# EAGLE board SparkFun_u-blox_SAM-M10Q-Panel (EAGLE 9.6.2), part 1 of 3
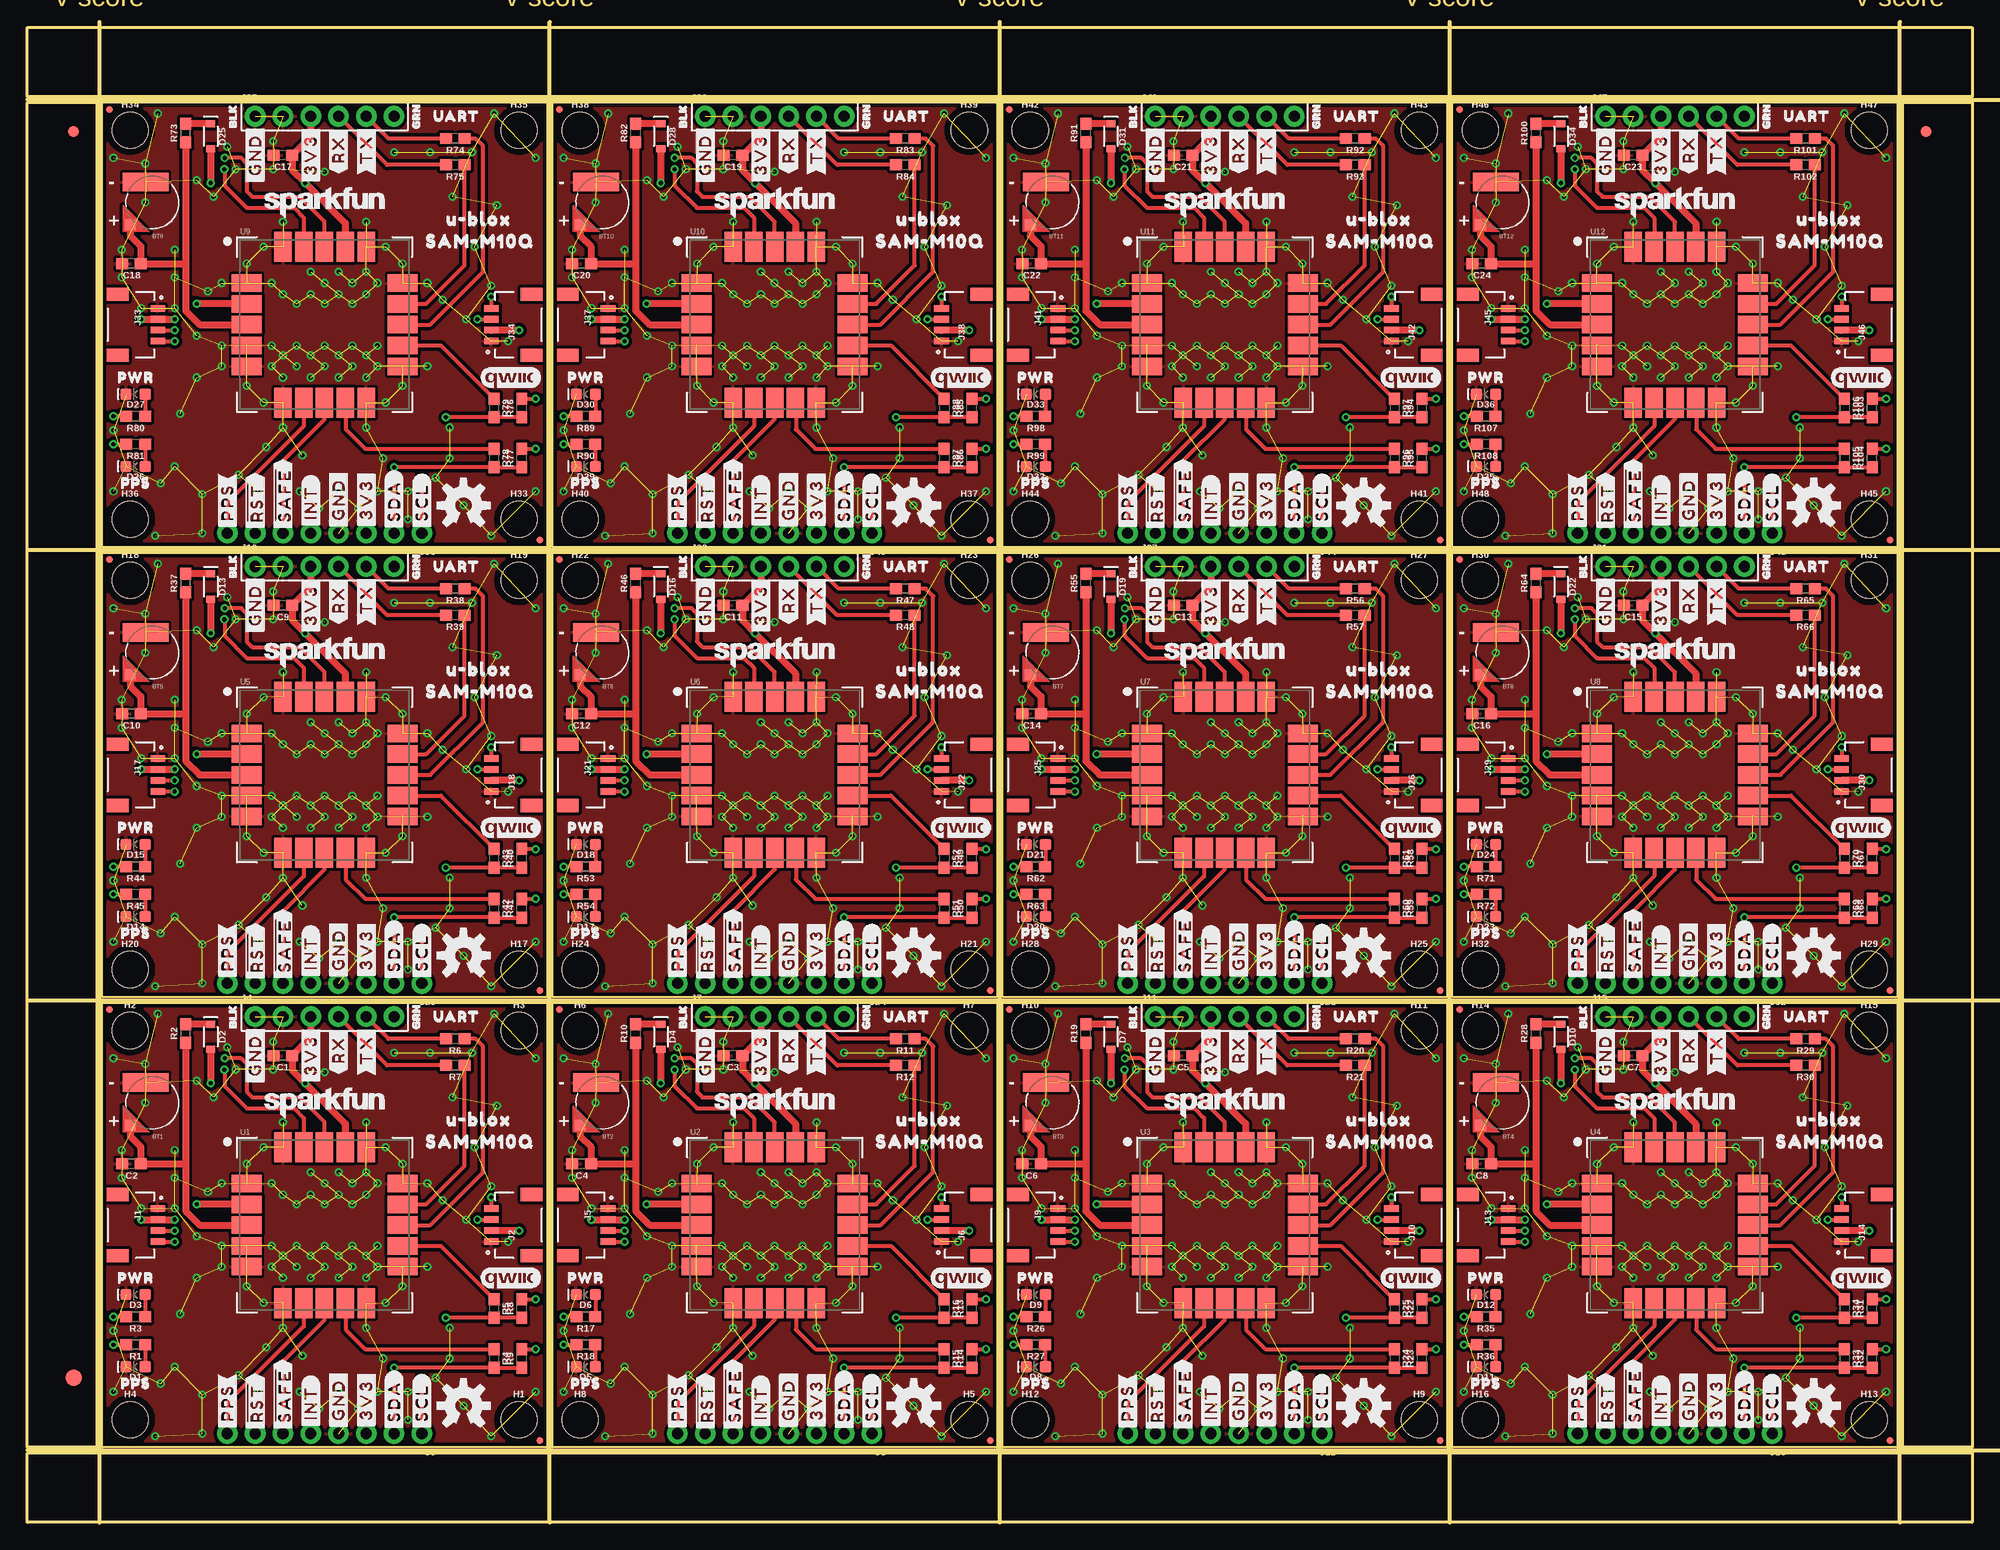
[diagram p0: board, top side]
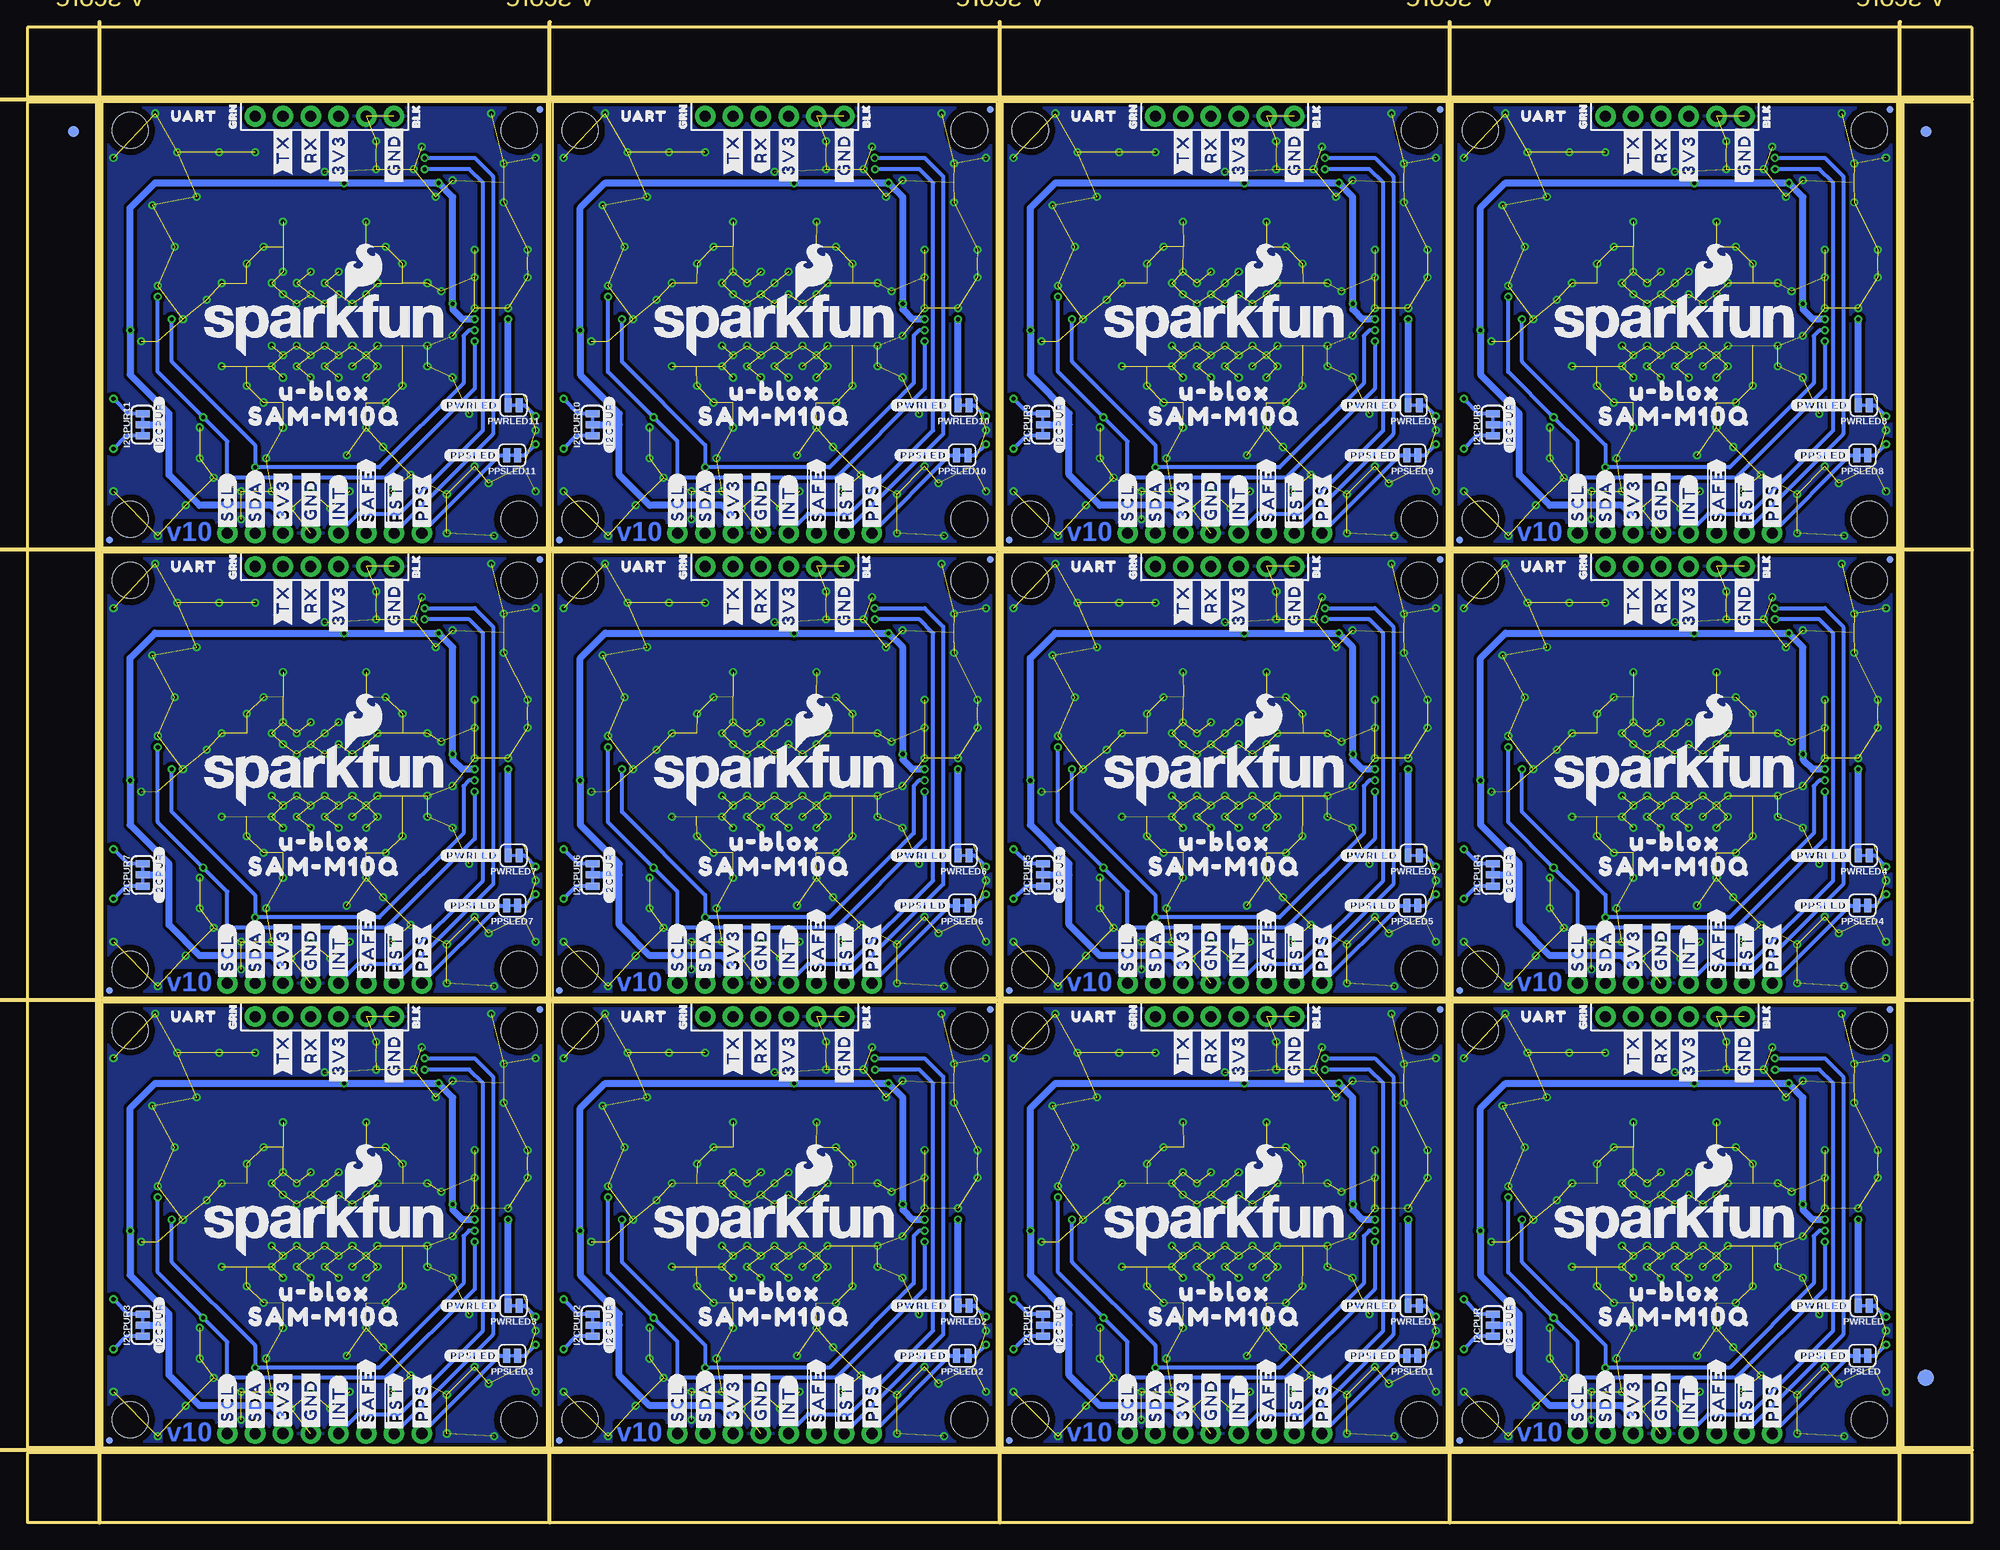
[diagram p1: board, bottom side, seen from below]

Size 177.8 x 136.65 mm. Coordinates in mm from the lower left corner, seen from the top.
Outline: 6.86,6.86 6.86,47.5 47.5,47.5 47.5,6.86 6.86,6.86
Outline: 48.01,6.86 48.01,47.5 88.65,47.5 88.65,6.86 48.01,6.86
Outline: 89.15,6.86 89.15,47.5 129.79,47.5 129.79,6.86 89.15,6.86
Outline: 130.3,6.86 130.3,47.5 170.94,47.5 170.94,6.86 130.3,6.86
Outline: 6.86,48.01 6.86,88.65 47.5,88.65 47.5,48.01 6.86,48.01
Outline: 48.01,48.01 48.01,88.65 88.65,88.65 88.65,48.01 48.01,48.01
Outline: 89.15,48.01 89.15,88.65 129.79,88.65 129.79,48.01 89.15,48.01
Outline: 130.3,48.01 130.3,88.65 170.94,88.65 170.94,48.01 130.3,48.01
Outline: 6.86,89.15 6.86,129.79 47.5,129.79 47.5,89.15 6.86,89.15
Outline: 48.01,89.15 48.01,129.79 88.65,129.79 88.65,89.15 48.01,89.15
Outline: 89.15,89.15 89.15,129.79 129.79,129.79 129.79,89.15 89.15,89.15
Outline: 130.3,89.15 130.3,129.79 170.94,129.79 170.94,89.15 130.3,89.15
Outline: 0,6.35 177.8,6.35 177.8,0 0,0 0,6.35
Outline: 171.45,129.79 177.8,129.79 177.8,6.86 171.45,6.86 171.45,129.79
Outline: 0,136.65 177.8,136.65 177.8,130.3 0,130.3 0,136.65
Outline: 0,129.79 6.35,129.79 6.35,6.86 0,6.86 0,129.79
Copper layers (1*16): Top 0.035mm / dielectric 1.5mm / Bottom 0.035mm
Design rules "SparkFun_u-blox_SAM-M10Q": minimum track width 7mil, minimum drill 0.3mm, track to track 7mil, track to pad 7mil, pad to pad 7mil, via to via 7mil, smd to smd 7mil, copper to edge 7mil, drill to drill 7mil, minimum pad ring 7mil, minimum via ring 7mil, stop-mask expansion 3mil, vias tented up to drill 25mil, thermal gap 10mil
tRestrict: area 19.8,24.3 to 20.3,24.4; area 61,24.3 to 61.5,24.4; area 102.1,24.3 to 102.6,24.4; area 143.3,24.3 to 143.8,24.4; area 19.8,65.4 to 20.3,65.5; area 61,65.4 to 61.5,65.5; area 102.1,65.4 to 102.6,65.5; area 143.3,65.4 to 143.8,65.5; area 19.8,106.6 to 20.3,106.7; area 61,106.6 to 61.5,106.7; area 102.1,106.6 to 102.6,106.7; area 143.3,106.6 to 143.8,106.7
Milling: 9 lines

## Footprints (pad centres in the part's own frame; a part is rotated, then mirrored left to right if it is on the bottom)
MS421R_IV03E = smd 1 x 1: + 2.022,2.032 | smd 4.2 x 1.7: - 0.6,-1.85
0603 = smd 1.1 x 1: 1 -0.85,0; 2 0.85,0
LED-0603 = smd 1 x 1: A -0.877,0; C 0.877,0
SOD-323 = smd 0.63 x 0.83: A 1.15,0; C -1.15,0
FIDUCIAL-1X2 = smd 1 x 1: 1 0,0
FIDUCIAL-1.5X3 = smd 1.5 x 1.5: 1 0,0
FIDUCIAL-MICRO = smd 0.635 x 0.635: 1 0,0
STAND-OFF = hole 3.302: 0,0
SMT-JUMPER_3_2-NC_TRACE_SILK = smd 0.635 x 1.27: 1 -1.016,0; 2 0,0; 3 1.016,0
JST04_1MM_RA = smd 0.6 x 1.35: 1 -1.5,0; 2 -0.5,0; 3 0.5,0; 4 1.5,0 | smd 1.2 x 2: NC1 2.8,-3.675; NC2 -2.8,-3.675
1X08_NO_SILK = drill 1.016 pad 1.88: 1 0,0; 2 2.54,0; 3 5.08,0; 4 7.62,0; 5 10.16,0; 6 12.7,0; 7 15.24,0; 8 17.78,0
1X06_NO_SILK = drill 1.016 pad 1.88: 1 0,0; 2 2.54,0; 3 5.08,0; 4 7.62,0; 5 10.16,0; 6 12.7,0
SMT-JUMPER_2_NC_TRACE_SILK = smd 0.635 x 1.27: 1 -0.508,0; 2 0.508,0
SAM-M10Q_QUAD_PASTE = smd 2.75 x 1.6: 1 -7.125,3.8; 2 -7.125,1.9; 3 -7.125,0; 4 -7.125,-1.9; 5 -7.125,-3.8; 11 7.125,-3.8; 12 7.125,-1.9; 13 7.125,0; 14 7.125,1.9; 15 7.125,3.8 | smd 1.6 x 2.75: 6 -3.8,-7.125; 7 -1.9,-7.125; 8 0,-7.125; 9 1.9,-7.125; 10 3.8,-7.125; 16 3.8,7.125; 17 1.9,7.125; 18 0,7.125; 19 -1.9,7.125; 20 -3.8,7.125

## Placement (x,y rotation side)
BT1  6.8MM_COIN_CELL  [MS421R_IV03E]  11.43,38.35 180 top
BT2  6.8MM_COIN_CELL  [MS421R_IV03E]  52.58,38.35 180 top
BT3  6.8MM_COIN_CELL  [MS421R_IV03E]  93.73,38.35 180 top
BT4  6.8MM_COIN_CELL  [MS421R_IV03E]  134.87,38.35 180 top
BT5  6.8MM_COIN_CELL  [MS421R_IV03E]  11.43,79.5 180 top
BT6  6.8MM_COIN_CELL  [MS421R_IV03E]  52.58,79.5 180 top
BT7  6.8MM_COIN_CELL  [MS421R_IV03E]  93.73,79.5 180 top
BT8  6.8MM_COIN_CELL  [MS421R_IV03E]  134.87,79.5 180 top
BT9  6.8MM_COIN_CELL  [MS421R_IV03E]  11.43,120.65 180 top
BT10  6.8MM_COIN_CELL  [MS421R_IV03E]  52.58,120.65 180 top
BT11  6.8MM_COIN_CELL  [MS421R_IV03E]  93.73,120.65 180 top
BT12  6.8MM_COIN_CELL  [MS421R_IV03E]  134.87,120.65 180 top
C1  0.1uF  [0603]  23.37,42.67 180 top
C2  0.1uF  [0603]  9.52,32.77 180 top
C3  0.1uF  [0603]  64.52,42.67 180 top
C4  0.1uF  [0603]  50.67,32.77 180 top
C5  0.1uF  [0603]  105.66,42.67 180 top
C6  0.1uF  [0603]  91.82,32.77 180 top
C7  0.1uF  [0603]  146.81,42.67 180 top
C8  0.1uF  [0603]  132.97,32.77 180 top
C9  0.1uF  [0603]  23.37,83.82 180 top
C10  0.1uF  [0603]  9.52,73.91 180 top
C11  0.1uF  [0603]  64.52,83.82 180 top
C12  0.1uF  [0603]  50.67,73.91 180 top
C13  0.1uF  [0603]  105.66,83.82 180 top
C14  0.1uF  [0603]  91.82,73.91 180 top
C15  0.1uF  [0603]  146.81,83.82 180 top
C16  0.1uF  [0603]  132.97,73.91 180 top
C17  0.1uF  [0603]  23.37,124.97 180 top
C18  0.1uF  [0603]  9.52,115.06 180 top
C19  0.1uF  [0603]  64.52,124.97 180 top
C20  0.1uF  [0603]  50.67,115.06 180 top
C21  0.1uF  [0603]  105.66,124.97 180 top
C22  0.1uF  [0603]  91.82,115.06 180 top
C23  0.1uF  [0603]  146.81,124.97 180 top
C24  0.1uF  [0603]  132.97,115.06 180 top
D1  Yellow  [LED-0603]  9.91,14.22 180 top
D2  0.5A/40V/420mV  [SOD-323]  16.76,44.4 270 top
D3  RED  [LED-0603]  9.91,20.83 180 top
D4  0.5A/40V/420mV  [SOD-323]  57.91,44.4 270 top
D5  Yellow  [LED-0603]  51.05,14.22 180 top
D6  RED  [LED-0603]  51.05,20.83 180 top
D7  0.5A/40V/420mV  [SOD-323]  99.06,44.4 270 top
D8  Yellow  [LED-0603]  92.2,14.22 180 top
D9  RED  [LED-0603]  92.2,20.83 180 top
D10  0.5A/40V/420mV  [SOD-323]  140.21,44.4 270 top
D11  Yellow  [LED-0603]  133.35,14.22 180 top
D12  RED  [LED-0603]  133.35,20.83 180 top
D13  0.5A/40V/420mV  [SOD-323]  16.76,85.55 270 top
D14  Yellow  [LED-0603]  9.91,55.37 180 top
D15  RED  [LED-0603]  9.91,61.98 180 top
D16  0.5A/40V/420mV  [SOD-323]  57.91,85.55 270 top
D17  Yellow  [LED-0603]  51.05,55.37 180 top
D18  RED  [LED-0603]  51.05,61.98 180 top
D19  0.5A/40V/420mV  [SOD-323]  99.06,85.55 270 top
D20  Yellow  [LED-0603]  92.2,55.37 180 top
D21  RED  [LED-0603]  92.2,61.98 180 top
D22  0.5A/40V/420mV  [SOD-323]  140.21,85.55 270 top
D23  Yellow  [LED-0603]  133.35,55.37 180 top
D24  RED  [LED-0603]  133.35,61.98 180 top
D25  0.5A/40V/420mV  [SOD-323]  16.76,126.7 270 top
D26  Yellow  [LED-0603]  9.91,96.52 180 top
D27  RED  [LED-0603]  9.91,103.12 180 top
D28  0.5A/40V/420mV  [SOD-323]  57.91,126.7 270 top
D29  Yellow  [LED-0603]  51.05,96.52 180 top
D30  RED  [LED-0603]  51.05,103.12 180 top
D31  0.5A/40V/420mV  [SOD-323]  99.06,126.7 270 top
D32  Yellow  [LED-0603]  92.2,96.52 180 top
D33  RED  [LED-0603]  92.2,103.12 180 top
D34  0.5A/40V/420mV  [SOD-323]  140.21,126.7 270 top
D35  Yellow  [LED-0603]  133.35,96.52 180 top
D36  RED  [LED-0603]  133.35,103.12 180 top
E$1  [FIDUCIAL-1X2]  4.23,127.13 0 top
E$2  [FIDUCIAL-1X2]  4.23,127.13 0 bottom
E$3  [FIDUCIAL-1X2]  173.57,127.13 0 top
E$4  [FIDUCIAL-1X2]  173.57,127.13 0 bottom
E$5  [FIDUCIAL-1.5X3]  4.23,13.21 0 top
E$6  [FIDUCIAL-1.5X3]  4.23,13.21 0 bottom
FD1  FIDUCIALUFIDUCIAL  [FIDUCIAL-MICRO]  46.86,7.49 0 bottom
FD2  FIDUCIALUFIDUCIAL  [FIDUCIAL-MICRO]  7.49,46.86 0 top
FD3  FIDUCIALUFIDUCIAL  [FIDUCIAL-MICRO]  7.49,46.86 0 bottom
FD4  FIDUCIALUFIDUCIAL  [FIDUCIAL-MICRO]  46.86,7.49 0 top
FD5  FIDUCIALUFIDUCIAL  [FIDUCIAL-MICRO]  88.01,7.49 0 bottom
FD6  FIDUCIALUFIDUCIAL  [FIDUCIAL-MICRO]  48.64,46.86 0 top
FD7  FIDUCIALUFIDUCIAL  [FIDUCIAL-MICRO]  48.64,46.86 0 bottom
FD8  FIDUCIALUFIDUCIAL  [FIDUCIAL-MICRO]  88.01,7.49 0 top
FD9  FIDUCIALUFIDUCIAL  [FIDUCIAL-MICRO]  129.16,7.49 0 bottom
FD10  FIDUCIALUFIDUCIAL  [FIDUCIAL-MICRO]  89.79,46.86 0 top
FD11  FIDUCIALUFIDUCIAL  [FIDUCIAL-MICRO]  89.79,46.86 0 bottom
FD12  FIDUCIALUFIDUCIAL  [FIDUCIAL-MICRO]  129.16,7.49 0 top
FD13  FIDUCIALUFIDUCIAL  [FIDUCIAL-MICRO]  170.31,7.49 0 bottom
FD14  FIDUCIALUFIDUCIAL  [FIDUCIAL-MICRO]  130.94,46.86 0 top
FD15  FIDUCIALUFIDUCIAL  [FIDUCIAL-MICRO]  130.94,46.86 0 bottom
FD16  FIDUCIALUFIDUCIAL  [FIDUCIAL-MICRO]  170.31,7.49 0 top
FD17  FIDUCIALUFIDUCIAL  [FIDUCIAL-MICRO]  46.86,48.64 0 bottom
FD18  FIDUCIALUFIDUCIAL  [FIDUCIAL-MICRO]  7.49,88.01 0 top
FD19  FIDUCIALUFIDUCIAL  [FIDUCIAL-MICRO]  7.49,88.01 0 bottom
FD20  FIDUCIALUFIDUCIAL  [FIDUCIAL-MICRO]  46.86,48.64 0 top
FD21  FIDUCIALUFIDUCIAL  [FIDUCIAL-MICRO]  88.01,48.64 0 bottom
FD22  FIDUCIALUFIDUCIAL  [FIDUCIAL-MICRO]  48.64,88.01 0 top
FD23  FIDUCIALUFIDUCIAL  [FIDUCIAL-MICRO]  48.64,88.01 0 bottom
FD24  FIDUCIALUFIDUCIAL  [FIDUCIAL-MICRO]  88.01,48.64 0 top
FD25  FIDUCIALUFIDUCIAL  [FIDUCIAL-MICRO]  129.16,48.64 0 bottom
FD26  FIDUCIALUFIDUCIAL  [FIDUCIAL-MICRO]  89.79,88.01 0 top
FD27  FIDUCIALUFIDUCIAL  [FIDUCIAL-MICRO]  89.79,88.01 0 bottom
FD28  FIDUCIALUFIDUCIAL  [FIDUCIAL-MICRO]  129.16,48.64 0 top
FD29  FIDUCIALUFIDUCIAL  [FIDUCIAL-MICRO]  170.31,48.64 0 bottom
FD30  FIDUCIALUFIDUCIAL  [FIDUCIAL-MICRO]  130.94,88.01 0 top
FD31  FIDUCIALUFIDUCIAL  [FIDUCIAL-MICRO]  130.94,88.01 0 bottom
FD32  FIDUCIALUFIDUCIAL  [FIDUCIAL-MICRO]  170.31,48.64 0 top
FD33  FIDUCIALUFIDUCIAL  [FIDUCIAL-MICRO]  46.86,89.79 0 bottom
FD34  FIDUCIALUFIDUCIAL  [FIDUCIAL-MICRO]  7.49,129.16 0 top
FD35  FIDUCIALUFIDUCIAL  [FIDUCIAL-MICRO]  7.49,129.16 0 bottom
FD36  FIDUCIALUFIDUCIAL  [FIDUCIAL-MICRO]  46.86,89.79 0 top
FD37  FIDUCIALUFIDUCIAL  [FIDUCIAL-MICRO]  88.01,89.79 0 bottom
FD38  FIDUCIALUFIDUCIAL  [FIDUCIAL-MICRO]  48.64,129.16 0 top
FD39  FIDUCIALUFIDUCIAL  [FIDUCIAL-MICRO]  48.64,129.16 0 bottom
FD40  FIDUCIALUFIDUCIAL  [FIDUCIAL-MICRO]  88.01,89.79 0 top
FD41  FIDUCIALUFIDUCIAL  [FIDUCIAL-MICRO]  129.16,89.79 0 bottom
FD42  FIDUCIALUFIDUCIAL  [FIDUCIAL-MICRO]  89.79,129.16 0 top
FD43  FIDUCIALUFIDUCIAL  [FIDUCIAL-MICRO]  89.79,129.16 0 bottom
FD44  FIDUCIALUFIDUCIAL  [FIDUCIAL-MICRO]  129.16,89.79 0 top
FD45  FIDUCIALUFIDUCIAL  [FIDUCIAL-MICRO]  170.31,89.79 0 bottom
FD46  FIDUCIALUFIDUCIAL  [FIDUCIAL-MICRO]  130.94,129.16 0 top
FD47  FIDUCIALUFIDUCIAL  [FIDUCIAL-MICRO]  130.94,129.16 0 bottom
FD48  FIDUCIALUFIDUCIAL  [FIDUCIAL-MICRO]  170.31,89.79 0 top
H1  STAND-OFF  [STAND-OFF]  44.96,9.4 0 top
H2  STAND-OFF  [STAND-OFF]  9.4,44.96 0 top
H3  STAND-OFF  [STAND-OFF]  44.96,44.96 0 top
H4  STAND-OFF  [STAND-OFF]  9.4,9.4 0 top
H5  STAND-OFF  [STAND-OFF]  86.11,9.4 0 top
H6  STAND-OFF  [STAND-OFF]  50.55,44.96 0 top
H7  STAND-OFF  [STAND-OFF]  86.11,44.96 0 top
H8  STAND-OFF  [STAND-OFF]  50.55,9.4 0 top
H9  STAND-OFF  [STAND-OFF]  127.25,9.4 0 top
H10  STAND-OFF  [STAND-OFF]  91.69,44.96 0 top
H11  STAND-OFF  [STAND-OFF]  127.25,44.96 0 top
H12  STAND-OFF  [STAND-OFF]  91.69,9.4 0 top
H13  STAND-OFF  [STAND-OFF]  168.4,9.4 0 top
H14  STAND-OFF  [STAND-OFF]  132.84,44.96 0 top
H15  STAND-OFF  [STAND-OFF]  168.4,44.96 0 top
H16  STAND-OFF  [STAND-OFF]  132.84,9.4 0 top
H17  STAND-OFF  [STAND-OFF]  44.96,50.55 0 top
H18  STAND-OFF  [STAND-OFF]  9.4,86.11 0 top
H19  STAND-OFF  [STAND-OFF]  44.96,86.11 0 top
H20  STAND-OFF  [STAND-OFF]  9.4,50.55 0 top
H21  STAND-OFF  [STAND-OFF]  86.11,50.55 0 top
H22  STAND-OFF  [STAND-OFF]  50.55,86.11 0 top
H23  STAND-OFF  [STAND-OFF]  86.11,86.11 0 top
H24  STAND-OFF  [STAND-OFF]  50.55,50.55 0 top
H25  STAND-OFF  [STAND-OFF]  127.25,50.55 0 top
H26  STAND-OFF  [STAND-OFF]  91.69,86.11 0 top
H27  STAND-OFF  [STAND-OFF]  127.25,86.11 0 top
H28  STAND-OFF  [STAND-OFF]  91.69,50.55 0 top
H29  STAND-OFF  [STAND-OFF]  168.4,50.55 0 top
H30  STAND-OFF  [STAND-OFF]  132.84,86.11 0 top
H31  STAND-OFF  [STAND-OFF]  168.4,86.11 0 top
H32  STAND-OFF  [STAND-OFF]  132.84,50.55 0 top
H33  STAND-OFF  [STAND-OFF]  44.96,91.69 0 top
H34  STAND-OFF  [STAND-OFF]  9.4,127.25 0 top
H35  STAND-OFF  [STAND-OFF]  44.96,127.25 0 top
H36  STAND-OFF  [STAND-OFF]  9.4,91.69 0 top
H37  STAND-OFF  [STAND-OFF]  86.11,91.69 0 top
H38  STAND-OFF  [STAND-OFF]  50.55,127.25 0 top
H39  STAND-OFF  [STAND-OFF]  86.11,127.25 0 top
H40  STAND-OFF  [STAND-OFF]  50.55,91.69 0 top
H41  STAND-OFF  [STAND-OFF]  127.25,91.69 0 top
H42  STAND-OFF  [STAND-OFF]  91.69,127.25 0 top
H43  STAND-OFF  [STAND-OFF]  127.25,127.25 0 top
H44  STAND-OFF  [STAND-OFF]  91.69,91.69 0 top
H45  STAND-OFF  [STAND-OFF]  168.4,91.69 0 top
H46  STAND-OFF  [STAND-OFF]  132.84,127.25 0 top
H47  STAND-OFF  [STAND-OFF]  168.4,127.25 0 top
H48  STAND-OFF  [STAND-OFF]  132.84,91.69 0 top
I2CPUR  JUMPER-SMT_3_2-NC_TRACE_SILK  [SMT-JUMPER_3_2-NC_TRACE_SILK]  43.81,18.03 90 bottom
I2CPUR1  JUMPER-SMT_3_2-NC_TRACE_SILK  [SMT-JUMPER_3_2-NC_TRACE_SILK]  84.96,18.03 90 bottom
I2CPUR2  JUMPER-SMT_3_2-NC_TRACE_SILK  [SMT-JUMPER_3_2-NC_TRACE_SILK]  126.11,18.03 90 bottom
I2CPUR3  JUMPER-SMT_3_2-NC_TRACE_SILK  [SMT-JUMPER_3_2-NC_TRACE_SILK]  167.26,18.03 90 bottom
I2CPUR4  JUMPER-SMT_3_2-NC_TRACE_SILK  [SMT-JUMPER_3_2-NC_TRACE_SILK]  43.81,59.18 90 bottom
I2CPUR5  JUMPER-SMT_3_2-NC_TRACE_SILK  [SMT-JUMPER_3_2-NC_TRACE_SILK]  84.96,59.18 90 bottom
I2CPUR6  JUMPER-SMT_3_2-NC_TRACE_SILK  [SMT-JUMPER_3_2-NC_TRACE_SILK]  126.11,59.18 90 bottom
I2CPUR7  JUMPER-SMT_3_2-NC_TRACE_SILK  [SMT-JUMPER_3_2-NC_TRACE_SILK]  167.26,59.18 90 bottom
I2CPUR8  JUMPER-SMT_3_2-NC_TRACE_SILK  [SMT-JUMPER_3_2-NC_TRACE_SILK]  43.81,100.33 90 bottom
I2CPUR9  JUMPER-SMT_3_2-NC_TRACE_SILK  [SMT-JUMPER_3_2-NC_TRACE_SILK]  84.96,100.33 90 bottom
I2CPUR10  JUMPER-SMT_3_2-NC_TRACE_SILK  [SMT-JUMPER_3_2-NC_TRACE_SILK]  126.11,100.33 90 bottom
I2CPUR11  JUMPER-SMT_3_2-NC_TRACE_SILK  [SMT-JUMPER_3_2-NC_TRACE_SILK]  167.26,100.33 90 bottom
J1  Qwiic Right Angle  [JST04_1MM_RA]  11.94,27.18 270 top
J2  Qwiic Right Angle  [JST04_1MM_RA]  42.42,27.18 90 top
J3  [1X08_NO_SILK]  36.07,8.13 180 top
J4  BOOT  [1X06_NO_SILK]  20.83,46.23 0 top
J5  Qwiic Right Angle  [JST04_1MM_RA]  53.09,27.18 270 top
J6  Qwiic Right Angle  [JST04_1MM_RA]  83.57,27.18 90 top
J7  BOOT  [1X06_NO_SILK]  61.98,46.23 0 top
J8  [1X08_NO_SILK]  77.22,8.13 180 top
J9  Qwiic Right Angle  [JST04_1MM_RA]  94.23,27.18 270 top
J10  Qwiic Right Angle  [JST04_1MM_RA]  124.71,27.18 90 top
J11  BOOT  [1X06_NO_SILK]  103.12,46.23 0 top
J12  [1X08_NO_SILK]  118.36,8.13 180 top
J13  Qwiic Right Angle  [JST04_1MM_RA]  135.38,27.18 270 top
J14  Qwiic Right Angle  [JST04_1MM_RA]  165.86,27.18 90 top
J15  BOOT  [1X06_NO_SILK]  144.27,46.23 0 top
J16  [1X08_NO_SILK]  159.51,8.13 180 top
J17  Qwiic Right Angle  [JST04_1MM_RA]  11.94,68.33 270 top
J18  Qwiic Right Angle  [JST04_1MM_RA]  42.42,68.33 90 top
J19  BOOT  [1X06_NO_SILK]  20.83,87.38 0 top
J20  [1X08_NO_SILK]  36.07,49.28 180 top
J21  Qwiic Right Angle  [JST04_1MM_RA]  53.09,68.33 270 top
J22  Qwiic Right Angle  [JST04_1MM_RA]  83.57,68.33 90 top
J23  BOOT  [1X06_NO_SILK]  61.98,87.38 0 top
J24  [1X08_NO_SILK]  77.22,49.28 180 top
J25  Qwiic Right Angle  [JST04_1MM_RA]  94.23,68.33 270 top
J26  Qwiic Right Angle  [JST04_1MM_RA]  124.71,68.33 90 top
J27  BOOT  [1X06_NO_SILK]  103.12,87.38 0 top
J28  [1X08_NO_SILK]  118.36,49.28 180 top
J29  Qwiic Right Angle  [JST04_1MM_RA]  135.38,68.33 270 top
J30  Qwiic Right Angle  [JST04_1MM_RA]  165.86,68.33 90 top
J31  BOOT  [1X06_NO_SILK]  144.27,87.38 0 top
J32  [1X08_NO_SILK]  159.51,49.28 180 top
J33  Qwiic Right Angle  [JST04_1MM_RA]  11.94,109.47 270 top
J34  Qwiic Right Angle  [JST04_1MM_RA]  42.42,109.47 90 top
J35  BOOT  [1X06_NO_SILK]  20.83,128.52 0 top
J36  [1X08_NO_SILK]  36.07,90.42 180 top
J37  Qwiic Right Angle  [JST04_1MM_RA]  53.09,109.47 270 top
J38  Qwiic Right Angle  [JST04_1MM_RA]  83.57,109.47 90 top
J39  BOOT  [1X06_NO_SILK]  61.98,128.52 0 top
J40  [1X08_NO_SILK]  77.22,90.42 180 top
J41  Qwiic Right Angle  [JST04_1MM_RA]  94.23,109.47 270 top
J42  Qwiic Right Angle  [JST04_1MM_RA]  124.71,109.47 90 top
J43  BOOT  [1X06_NO_SILK]  103.12,128.52 0 top
J44  [1X08_NO_SILK]  118.36,90.42 180 top
J45  Qwiic Right Angle  [JST04_1MM_RA]  135.38,109.47 270 top
J46  Qwiic Right Angle  [JST04_1MM_RA]  165.86,109.47 90 top
J47  BOOT  [1X06_NO_SILK]  144.27,128.52 0 top
J48  [1X08_NO_SILK]  159.51,90.42 180 top
LOGO1  OSHW-LOGOM  [OSHW-LOGO-M]  39.88,10.67 0 top
LOGO2  SFE_LOGO_NAME_FLAME.2_INCH  [SFE_LOGO_NAME_FLAME_.2]  27.18,27.18 0 bottom
LOGO3  QWIIC_LOGO_CONNECTOR  [QWIIC_5.5MM]  44.2,22.35 0 top
LOGO4  OSHW-LOGOM  [OSHW-LOGO-M]  81.03,10.67 0 top
LOGO5  SFE_LOGO_NAME_FLAME.2_INCH  [SFE_LOGO_NAME_FLAME_.2]  68.33,27.18 0 bottom
LOGO6  QWIIC_LOGO_CONNECTOR  [QWIIC_5.5MM]  85.34,22.35 0 top
LOGO7  OSHW-LOGOM  [OSHW-LOGO-M]  122.17,10.67 0 top
LOGO8  SFE_LOGO_NAME_FLAME.2_INCH  [SFE_LOGO_NAME_FLAME_.2]  109.47,27.18 0 bottom
LOGO9  QWIIC_LOGO_CONNECTOR  [QWIIC_5.5MM]  126.49,22.35 0 top
LOGO10  OSHW-LOGOM  [OSHW-LOGO-M]  163.32,10.67 0 top
LOGO11  SFE_LOGO_NAME_FLAME.2_INCH  [SFE_LOGO_NAME_FLAME_.2]  150.62,27.18 0 bottom
LOGO12  QWIIC_LOGO_CONNECTOR  [QWIIC_5.5MM]  167.64,22.35 0 top
LOGO13  OSHW-LOGOM  [OSHW-LOGO-M]  39.88,51.82 0 top
LOGO14  SFE_LOGO_NAME_FLAME.2_INCH  [SFE_LOGO_NAME_FLAME_.2]  27.18,68.33 0 bottom
LOGO15  QWIIC_LOGO_CONNECTOR  [QWIIC_5.5MM]  44.2,63.5 0 top
LOGO16  OSHW-LOGOM  [OSHW-LOGO-M]  81.03,51.82 0 top
LOGO17  SFE_LOGO_NAME_FLAME.2_INCH  [SFE_LOGO_NAME_FLAME_.2]  68.33,68.33 0 bottom
LOGO18  QWIIC_LOGO_CONNECTOR  [QWIIC_5.5MM]  85.34,63.5 0 top
LOGO19  OSHW-LOGOM  [OSHW-LOGO-M]  122.17,51.82 0 top
LOGO20  SFE_LOGO_NAME_FLAME.2_INCH  [SFE_LOGO_NAME_FLAME_.2]  109.47,68.33 0 bottom
LOGO21  QWIIC_LOGO_CONNECTOR  [QWIIC_5.5MM]  126.49,63.5 0 top
LOGO22  OSHW-LOGOM  [OSHW-LOGO-M]  163.32,51.82 0 top
LOGO23  SFE_LOGO_NAME_FLAME.2_INCH  [SFE_LOGO_NAME_FLAME_.2]  150.62,68.33 0 bottom
LOGO24  QWIIC_LOGO_CONNECTOR  [QWIIC_5.5MM]  167.64,63.5 0 top
LOGO25  OSHW-LOGOM  [OSHW-LOGO-M]  39.88,92.96 0 top
LOGO26  SFE_LOGO_NAME_FLAME.2_INCH  [SFE_LOGO_NAME_FLAME_.2]  27.18,109.47 0 bottom
LOGO27  QWIIC_LOGO_CONNECTOR  [QWIIC_5.5MM]  44.2,104.65 0 top
LOGO28  OSHW-LOGOM  [OSHW-LOGO-M]  81.03,92.96 0 top
LOGO29  SFE_LOGO_NAME_FLAME.2_INCH  [SFE_LOGO_NAME_FLAME_.2]  68.33,109.47 0 bottom
LOGO30  QWIIC_LOGO_CONNECTOR  [QWIIC_5.5MM]  85.34,104.65 0 top
LOGO31  OSHW-LOGOM  [OSHW-LOGO-M]  122.17,92.96 0 top
LOGO32  SFE_LOGO_NAME_FLAME.2_INCH  [SFE_LOGO_NAME_FLAME_.2]  109.47,109.47 0 bottom
LOGO33  QWIIC_LOGO_CONNECTOR  [QWIIC_5.5MM]  126.49,104.65 0 top
LOGO34  OSHW-LOGOM  [OSHW-LOGO-M]  163.32,92.96 0 top
LOGO35  SFE_LOGO_NAME_FLAME.2_INCH  [SFE_LOGO_NAME_FLAME_.2]  150.62,109.47 0 bottom
LOGO36  QWIIC_LOGO_CONNECTOR  [QWIIC_5.5MM]  167.64,104.65 0 top
PPSLED  [SMT-JUMPER_2_NC_TRACE_SILK]  10.03,15.24 180 bottom
PPSLED1  [SMT-JUMPER_2_NC_TRACE_SILK]  51.18,15.24 180 bottom
PPSLED2  [SMT-JUMPER_2_NC_TRACE_SILK]  92.33,15.24 180 bottom
PPSLED3  [SMT-JUMPER_2_NC_TRACE_SILK]  133.48,15.24 180 bottom
PPSLED4  [SMT-JUMPER_2_NC_TRACE_SILK]  10.03,56.39 180 bottom
PPSLED5  [SMT-JUMPER_2_NC_TRACE_SILK]  51.18,56.39 180 bottom
PPSLED6  [SMT-JUMPER_2_NC_TRACE_SILK]  92.33,56.39 180 bottom
PPSLED7  [SMT-JUMPER_2_NC_TRACE_SILK]  133.48,56.39 180 bottom
PPSLED8  [SMT-JUMPER_2_NC_TRACE_SILK]  10.03,97.54 180 bottom
PPSLED9  [SMT-JUMPER_2_NC_TRACE_SILK]  51.18,97.54 180 bottom
PPSLED10  [SMT-JUMPER_2_NC_TRACE_SILK]  92.33,97.54 180 bottom
PPSLED11  [SMT-JUMPER_2_NC_TRACE_SILK]  133.48,97.54 180 bottom
PWRLED  JUMPER-SMT_2_NC_TRACE_SILK  [SMT-JUMPER_2_NC_TRACE_SILK]  9.91,19.81 180 bottom
PWRLED1  JUMPER-SMT_2_NC_TRACE_SILK  [SMT-JUMPER_2_NC_TRACE_SILK]  51.05,19.81 180 bottom
PWRLED2  JUMPER-SMT_2_NC_TRACE_SILK  [SMT-JUMPER_2_NC_TRACE_SILK]  92.2,19.81 180 bottom
PWRLED3  JUMPER-SMT_2_NC_TRACE_SILK  [SMT-JUMPER_2_NC_TRACE_SILK]  133.35,19.81 180 bottom
PWRLED4  JUMPER-SMT_2_NC_TRACE_SILK  [SMT-JUMPER_2_NC_TRACE_SILK]  9.91,60.96 180 bottom
PWRLED5  JUMPER-SMT_2_NC_TRACE_SILK  [SMT-JUMPER_2_NC_TRACE_SILK]  51.05,60.96 180 bottom
PWRLED6  JUMPER-SMT_2_NC_TRACE_SILK  [SMT-JUMPER_2_NC_TRACE_SILK]  92.2,60.96 180 bottom
PWRLED7  JUMPER-SMT_2_NC_TRACE_SILK  [SMT-JUMPER_2_NC_TRACE_SILK]  133.35,60.96 180 bottom
PWRLED8  JUMPER-SMT_2_NC_TRACE_SILK  [SMT-JUMPER_2_NC_TRACE_SILK]  9.91,102.11 180 bottom
PWRLED9  JUMPER-SMT_2_NC_TRACE_SILK  [SMT-JUMPER_2_NC_TRACE_SILK]  51.05,102.11 180 bottom
PWRLED10  JUMPER-SMT_2_NC_TRACE_SILK  [SMT-JUMPER_2_NC_TRACE_SILK]  92.2,102.11 180 bottom
PWRLED11  JUMPER-SMT_2_NC_TRACE_SILK  [SMT-JUMPER_2_NC_TRACE_SILK]  133.35,102.11 180 bottom
R1  2.2k  [0603]  9.91,16.26 180 top
R2  3.3k  [0603]  14.48,44.7 90 top
R3  1k  [0603]  9.91,18.8 180 top
R4  22  [0603]  42.67,14.99 270 top
R5  22  [0603]  42.67,19.56 270 top
R6  470  [0603]  39.12,44.2 180 top
R7  470  [0603]  39.12,41.78 180 top
R8  2.2k  [0603]  45.21,19.56 90 top
R9  2.2k  [0603]  45.21,14.99 90 top
R10  3.3k  [0603]  55.63,44.7 90 top
R11  470  [0603]  80.26,44.2 180 top
R12  470  [0603]  80.26,41.78 180 top
R13  2.2k  [0603]  86.36,19.56 90 top
R14  2.2k  [0603]  86.36,14.99 90 top
R15  22  [0603]  83.82,14.99 270 top
R16  22  [0603]  83.82,19.56 270 top
R17  1k  [0603]  51.05,18.8 180 top
R18  2.2k  [0603]  51.05,16.26 180 top
R19  3.3k  [0603]  96.77,44.7 90 top
R20  470  [0603]  121.41,44.2 180 top
R21  470  [0603]  121.41,41.78 180 top
R22  2.2k  [0603]  127.51,19.56 90 top
R23  2.2k  [0603]  127.51,14.99 90 top
R24  22  [0603]  124.97,14.99 270 top
R25  22  [0603]  124.97,19.56 270 top
R26  1k  [0603]  92.2,18.8 180 top
R27  2.2k  [0603]  92.2,16.26 180 top
R28  3.3k  [0603]  137.92,44.7 90 top
R29  470  [0603]  162.56,44.2 180 top
R30  470  [0603]  162.56,41.78 180 top
R31  2.2k  [0603]  168.66,19.56 90 top
R32  2.2k  [0603]  168.66,14.99 90 top
R33  22  [0603]  166.12,14.99 270 top
R34  22  [0603]  166.12,19.56 270 top
R35  1k  [0603]  133.35,18.8 180 top
R36  2.2k  [0603]  133.35,16.26 180 top
R37  3.3k  [0603]  14.48,85.85 90 top
R38  470  [0603]  39.12,85.34 180 top
R39  470  [0603]  39.12,82.93 180 top
R40  2.2k  [0603]  45.21,60.71 90 top
R41  2.2k  [0603]  45.21,56.13 90 top
R42  22  [0603]  42.67,56.13 270 top
R43  22  [0603]  42.67,60.71 270 top
R44  1k  [0603]  9.91,59.94 180 top
R45  2.2k  [0603]  9.91,57.4 180 top
R46  3.3k  [0603]  55.63,85.85 90 top
R47  470  [0603]  80.26,85.34 180 top
R48  470  [0603]  80.26,82.93 180 top
R49  2.2k  [0603]  86.36,60.71 90 top
R50  2.2k  [0603]  86.36,56.13 90 top
R51  22  [0603]  83.82,56.13 270 top
R52  22  [0603]  83.82,60.71 270 top
R53  1k  [0603]  51.05,59.94 180 top
R54  2.2k  [0603]  51.05,57.4 180 top
R55  3.3k  [0603]  96.77,85.85 90 top
R56  470  [0603]  121.41,85.34 180 top
R57  470  [0603]  121.41,82.93 180 top
R58  2.2k  [0603]  127.51,60.71 90 top
R59  2.2k  [0603]  127.51,56.13 90 top
R60  22  [0603]  124.97,56.13 270 top
R61  22  [0603]  124.97,60.71 270 top
R62  1k  [0603]  92.2,59.94 180 top
R63  2.2k  [0603]  92.2,57.4 180 top
R64  3.3k  [0603]  137.92,85.85 90 top
R65  470  [0603]  162.56,85.34 180 top
R66  470  [0603]  162.56,82.93 180 top
R67  2.2k  [0603]  168.66,60.71 90 top
R68  2.2k  [0603]  168.66,56.13 90 top
R69  22  [0603]  166.12,56.13 270 top
R70  22  [0603]  166.12,60.71 270 top
R71  1k  [0603]  133.35,59.94 180 top
R72  2.2k  [0603]  133.35,57.4 180 top
R73  3.3k  [0603]  14.48,127 90 top
R74  470  [0603]  39.12,126.49 180 top
R75  470  [0603]  39.12,124.08 180 top
R76  2.2k  [0603]  45.21,101.85 90 top
R77  2.2k  [0603]  45.21,97.28 90 top
R78  22  [0603]  42.67,97.28 270 top
R79  22  [0603]  42.67,101.85 270 top
R80  1k  [0603]  9.91,101.09 180 top
R81  2.2k  [0603]  9.91,98.55 180 top
R82  3.3k  [0603]  55.63,127 90 top
R83  470  [0603]  80.26,126.49 180 top
R84  470  [0603]  80.26,124.08 180 top
R85  2.2k  [0603]  86.36,101.85 90 top
R86  2.2k  [0603]  86.36,97.28 90 top
R87  22  [0603]  83.82,97.28 270 top
R88  22  [0603]  83.82,101.85 270 top
R89  1k  [0603]  51.05,101.09 180 top
R90  2.2k  [0603]  51.05,98.55 180 top
R91  3.3k  [0603]  96.77,127 90 top
R92  470  [0603]  121.41,126.49 180 top
R93  470  [0603]  121.41,124.08 180 top
R94  2.2k  [0603]  127.51,101.85 90 top
R95  2.2k  [0603]  127.51,97.28 90 top
R96  22  [0603]  124.97,97.28 270 top
R97  22  [0603]  124.97,101.85 270 top
R98  1k  [0603]  92.2,101.09 180 top
R99  2.2k  [0603]  92.2,98.55 180 top
R100  3.3k  [0603]  137.92,127 90 top
R101  470  [0603]  162.56,126.49 180 top
R102  470  [0603]  162.56,124.08 180 top
R103  2.2k  [0603]  168.66,101.85 90 top
R104  2.2k  [0603]  168.66,97.28 90 top
R105  22  [0603]  166.12,97.28 270 top
R106  22  [0603]  166.12,101.85 270 top
R107  1k  [0603]  133.35,101.09 180 top
R108  2.2k  [0603]  133.35,98.55 180 top
U1  U-BLOX_SAM_M10Q-00B_QUAD_PASTE  [SAM-M10Q_QUAD_PASTE]  27.18,27.18 0 top
U2  U-BLOX_SAM_M10Q-00B_QUAD_PASTE  [SAM-M10Q_QUAD_PASTE]  68.33,27.18 0 top
U3  U-BLOX_SAM_M10Q-00B_QUAD_PASTE  [SAM-M10Q_QUAD_PASTE]  109.47,27.18 0 top
U4  U-BLOX_SAM_M10Q-00B_QUAD_PASTE  [SAM-M10Q_QUAD_PASTE]  150.62,27.18 0 top
U5  U-BLOX_SAM_M10Q-00B_QUAD_PASTE  [SAM-M10Q_QUAD_PASTE]  27.18,68.33 0 top
U6  U-BLOX_SAM_M10Q-00B_QUAD_PASTE  [SAM-M10Q_QUAD_PASTE]  68.33,68.33 0 top
U7  U-BLOX_SAM_M10Q-00B_QUAD_PASTE  [SAM-M10Q_QUAD_PASTE]  109.47,68.33 0 top
U8  U-BLOX_SAM_M10Q-00B_QUAD_PASTE  [SAM-M10Q_QUAD_PASTE]  150.62,68.33 0 top
U9  U-BLOX_SAM_M10Q-00B_QUAD_PASTE  [SAM-M10Q_QUAD_PASTE]  27.18,109.47 0 top
U10  U-BLOX_SAM_M10Q-00B_QUAD_PASTE  [SAM-M10Q_QUAD_PASTE]  68.33,109.47 0 top
U11  U-BLOX_SAM_M10Q-00B_QUAD_PASTE  [SAM-M10Q_QUAD_PASTE]  109.47,109.47 0 top
U12  U-BLOX_SAM_M10Q-00B_QUAD_PASTE  [SAM-M10Q_QUAD_PASTE]  150.62,109.47 0 top
U$1  [SFE_LOGO_FLAME_STOP_.1]  13.97,9.4 0 top
U$2  [SAM#M10Q11]  41.4,34.8 0 top
U$3  [BLK4]  18.8,46.23 90 top
U$4  [BLK4]  18.8,46.23 90 bottom
U$5  [GRN5]  35.56,46.23 90 top
U$6  [GRN5]  35.56,46.23 90 bottom
U$7  [UART7]  39.24,46.23 0 top
U$8  [UART7]  39.12,46.23 0 bottom
U$9  [PPS9]  9.91,12.7 0 top
U$10  [PWR10]  9.91,22.35 0 top
U$11  [#TX#12]  30.99,43.18 90 top
U$12  [#TX#12]  30.99,43.18 90 bottom
U$13  [#RX#13]  28.45,43.18 90 top
U$14  [#RX#13]  28.45,43.18 90 bottom
U$15  [#3V3#0]  25.91,42.67 90 top
U$16  [#3V3#0]  25.91,42.67 90 bottom
U$17  [#GND#4]  20.83,42.67 90 top
U$18  [U#BLOX11]  41.27,36.83 0 top
U$19  [#GND#5]  28.45,11.18 90 top
U$20  [#GND#4]  20.83,42.67 90 bottom
U$21  [#GND#5]  28.45,11.18 90 bottom
U$22  [#3V3#0]  30.99,11.18 90 top
U$23  [#3V3#0]  30.99,11.18 90 bottom
U$24  [#SCL#6]  36.07,10.92 90 top
U$25  [#SCL#6]  36.07,10.92 90 bottom
U$26  [#SDA#7]  33.53,11.05 90 top
U$27  [#SDA#7]  33.53,11.05 90 bottom
U$28  [#INT#8]  25.91,10.92 90 top
U$29  [#INT#8]  25.91,10.92 90 bottom
U$30  [##RST##15]  20.83,10.92 90 top
U$31  [SFE_LOGO_NAME_.1]  27.18,38.35 0 top
U$32  [SAM#M10Q12]  27.18,18.8 0 bottom
U$33  [##RST##15]  20.83,10.92 90 bottom
U$34  [#PPS#13]  18.29,10.92 90 top
U$35  [#PPS#13]  18.29,10.92 90 bottom
U$36  [##SAFE##16]  23.37,11.56 90 top
U$37  [##SAFE##16]  23.37,11.56 90 bottom
U$38  [U#BLOX12]  27.18,21.08 0 bottom
U$39  [SFE_LOGO_FLAME_STOP_.1]  55.12,9.4 0 top
U$40  [#PPSLED#0]  13.59,15.24 0 bottom
U$41  [#I2CPUR#0]  42.29,18.03 90 bottom
U$42  [#PWRLED#0]  13.72,19.81 0 bottom
U$43  [BLK4]  59.94,46.23 90 top
U$44  [BLK4]  59.94,46.23 90 bottom
U$45  [GRN5]  76.71,46.23 90 top
U$46  [GRN5]  76.71,46.23 90 bottom
U$47  [UART7]  80.39,46.23 0 top
U$48  [UART7]  80.26,46.23 0 bottom
U$49  [PPS9]  51.05,12.7 0 top
U$50  [PWR10]  51.05,22.35 0 top
U$51  [#TX#12]  72.14,43.18 90 top
U$52  [#TX#12]  72.14,43.18 90 bottom
U$53  [#RX#13]  69.6,43.18 90 top
U$54  [#RX#13]  69.6,43.18 90 bottom
U$55  [#3V3#0]  67.06,42.67 90 top
U$56  [#3V3#0]  67.06,42.67 90 bottom
U$57  [#GND#4]  61.98,42.67 90 top
U$58  [#GND#4]  61.98,42.67 90 bottom
U$59  [#GND#5]  69.6,11.18 90 top
U$60  [#GND#5]  69.6,11.18 90 bottom
U$61  [#3V3#0]  72.14,11.18 90 top
U$62  [#3V3#0]  72.14,11.18 90 bottom
U$63  [#SCL#6]  77.22,10.92 90 top
U$64  [#SCL#6]  77.22,10.92 90 bottom
U$65  [#SDA#7]  74.68,11.05 90 top
U$66  [#SDA#7]  74.68,11.05 90 bottom
U$67  [#INT#8]  67.06,10.92 90 top
U$68  [#INT#8]  67.06,10.92 90 bottom
U$69  [#PPS#13]  59.44,10.92 90 top
U$70  [#PPS#13]  59.44,10.92 90 bottom
U$71  [##RST##15]  61.98,10.92 90 top
U$72  [##RST##15]  61.98,10.92 90 bottom
U$73  [##SAFE##16]  64.52,11.56 90 top
U$74  [##SAFE##16]  64.52,11.56 90 bottom
U$75  [SFE_LOGO_NAME_.1]  68.33,38.35 0 top
U$76  [#PWRLED#0]  54.86,19.81 0 bottom
U$77  [#PPSLED#0]  54.74,15.24 0 bottom
U$78  [#I2CPUR#0]  83.44,18.03 90 bottom
U$79  [SAM#M10Q11]  82.55,34.8 0 top
U$80  [U#BLOX11]  82.42,36.83 0 top
U$81  [SAM#M10Q12]  68.33,18.8 0 bottom
U$82  [U#BLOX12]  68.33,21.08 0 bottom
U$83  [SFE_LOGO_FLAME_STOP_.1]  96.27,9.4 0 top
U$84  [BLK4]  101.09,46.23 90 top
U$85  [BLK4]  101.09,46.23 90 bottom
U$86  [GRN5]  117.86,46.23 90 top
U$87  [GRN5]  117.86,46.23 90 bottom
U$88  [UART7]  121.54,46.23 0 top
U$89  [UART7]  121.41,46.23 0 bottom
U$90  [PPS9]  92.2,12.7 0 top
U$91  [PWR10]  92.2,22.35 0 top
U$92  [#TX#12]  113.28,43.18 90 top
U$93  [#TX#12]  113.28,43.18 90 bottom
U$94  [#RX#13]  110.74,43.18 90 top
U$95  [#RX#13]  110.74,43.18 90 bottom
U$96  [#3V3#0]  108.2,42.67 90 top
U$97  [#3V3#0]  108.2,42.67 90 bottom
U$98  [#GND#4]  103.12,42.67 90 top
U$99  [#GND#4]  103.12,42.67 90 bottom
U$100  [#GND#5]  110.74,11.18 90 top
U$101  [#GND#5]  110.74,11.18 90 bottom
U$102  [#3V3#0]  113.28,11.18 90 top
U$103  [#3V3#0]  113.28,11.18 90 bottom
U$104  [#SCL#6]  118.36,10.92 90 top
U$105  [#SCL#6]  118.36,10.92 90 bottom
U$106  [#SDA#7]  115.82,11.05 90 top
U$107  [#SDA#7]  115.82,11.05 90 bottom
U$108  [#INT#8]  108.2,10.92 90 top
U$109  [#INT#8]  108.2,10.92 90 bottom
U$110  [#PPS#13]  100.58,10.92 90 top
U$111  [#PPS#13]  100.58,10.92 90 bottom
U$112  [##RST##15]  103.12,10.92 90 top
U$113  [##RST##15]  103.12,10.92 90 bottom
U$114  [##SAFE##16]  105.66,11.56 90 top
U$115  [##SAFE##16]  105.66,11.56 90 bottom
U$116  [SFE_LOGO_NAME_.1]  109.47,38.35 0 top
U$117  [#PWRLED#0]  96.01,19.81 0 bottom
U$118  [#PPSLED#0]  95.89,15.24 0 bottom
U$119  [#I2CPUR#0]  124.59,18.03 90 bottom
U$120  [SAM#M10Q11]  123.7,34.8 0 top
U$121  [U#BLOX11]  123.57,36.83 0 top
U$122  [SAM#M10Q12]  109.47,18.8 0 bottom
U$123  [U#BLOX12]  109.47,21.08 0 bottom
U$124  [SFE_LOGO_FLAME_STOP_.1]  137.41,9.4 0 top
U$125  [BLK4]  142.24,46.23 90 top
U$126  [BLK4]  142.24,46.23 90 bottom
U$127  [GRN5]  159,46.23 90 top
U$128  [GRN5]  159,46.23 90 bottom
U$129  [UART7]  162.69,46.23 0 top
U$130  [UART7]  162.56,46.23 0 bottom
U$131  [PPS9]  133.35,12.7 0 top
U$132  [PWR10]  133.35,22.35 0 top
U$133  [#TX#12]  154.43,43.18 90 top
U$134  [#TX#12]  154.43,43.18 90 bottom
U$135  [#RX#13]  151.89,43.18 90 top
U$136  [#RX#13]  151.89,43.18 90 bottom
U$137  [#3V3#0]  149.35,42.67 90 top
U$138  [#3V3#0]  149.35,42.67 90 bottom
U$139  [#GND#4]  144.27,42.67 90 top
U$140  [#GND#4]  144.27,42.67 90 bottom
U$141  [#GND#5]  151.89,11.18 90 top
U$142  [#GND#5]  151.89,11.18 90 bottom
U$143  [#3V3#0]  154.43,11.18 90 top
U$144  [#3V3#0]  154.43,11.18 90 bottom
U$145  [#SCL#6]  159.51,10.92 90 top
U$146  [#SCL#6]  159.51,10.92 90 bottom
U$147  [#SDA#7]  156.97,11.05 90 top
U$148  [#SDA#7]  156.97,11.05 90 bottom
U$149  [#INT#8]  149.35,10.92 90 top
U$150  [#INT#8]  149.35,10.92 90 bottom
U$151  [#PPS#13]  141.73,10.92 90 top
U$152  [#PPS#13]  141.73,10.92 90 bottom
U$153  [##RST##15]  144.27,10.92 90 top
U$154  [##RST##15]  144.27,10.92 90 bottom
U$155  [##SAFE##16]  146.81,11.56 90 top
U$156  [##SAFE##16]  146.81,11.56 90 bottom
U$157  [SFE_LOGO_NAME_.1]  150.62,38.35 0 top
U$158  [#PWRLED#0]  137.16,19.81 0 bottom
U$159  [#PPSLED#0]  137.03,15.24 0 bottom
U$160  [#I2CPUR#0]  165.74,18.03 90 bottom
U$161  [SAM#M10Q11]  164.85,34.8 0 top
U$162  [U#BLOX11]  164.72,36.83 0 top
U$163  [SAM#M10Q12]  150.62,18.8 0 bottom
U$164  [U#BLOX12]  150.62,21.08 0 bottom
U$165  [SFE_LOGO_FLAME_STOP_.1]  13.97,50.55 0 top
U$166  [BLK4]  18.8,87.38 90 top
U$167  [BLK4]  18.8,87.38 90 bottom
U$168  [GRN5]  35.56,87.38 90 top
U$169  [GRN5]  35.56,87.38 90 bottom
U$170  [UART7]  39.24,87.38 0 top
U$171  [UART7]  39.12,87.38 0 bottom
U$172  [PPS9]  9.91,53.85 0 top
U$173  [PWR10]  9.91,63.5 0 top
U$174  [#TX#12]  30.99,84.33 90 top
U$175  [#TX#12]  30.99,84.33 90 bottom
U$176  [#RX#13]  28.45,84.33 90 top
U$177  [#RX#13]  28.45,84.33 90 bottom
U$178  [#3V3#0]  25.91,83.82 90 top
U$179  [#3V3#0]  25.91,83.82 90 bottom
U$180  [#GND#4]  20.83,83.82 90 top
U$181  [#GND#4]  20.83,83.82 90 bottom
U$182  [#GND#5]  28.45,52.32 90 top
U$183  [#GND#5]  28.45,52.32 90 bottom
U$184  [#3V3#0]  30.99,52.32 90 top
U$185  [#3V3#0]  30.99,52.32 90 bottom
U$186  [#SCL#6]  36.07,52.07 90 top
U$187  [#SCL#6]  36.07,52.07 90 bottom
U$188  [#SDA#7]  33.53,52.2 90 top
U$189  [#SDA#7]  33.53,52.2 90 bottom
U$190  [#INT#8]  25.91,52.07 90 top
U$191  [#INT#8]  25.91,52.07 90 bottom
U$192  [#PPS#13]  18.29,52.07 90 top
U$193  [#PPS#13]  18.29,52.07 90 bottom
U$194  [##RST##15]  20.83,52.07 90 top
U$195  [##RST##15]  20.83,52.07 90 bottom
U$196  [##SAFE##16]  23.37,52.7 90 top
U$197  [##SAFE##16]  23.37,52.7 90 bottom
U$198  [SFE_LOGO_NAME_.1]  27.18,79.5 0 top
U$199  [#PWRLED#0]  13.72,60.96 0 bottom
U$200  [#PPSLED#0]  13.59,56.39 0 bottom
U$201  [#I2CPUR#0]  42.29,59.18 90 bottom
U$202  [SAM#M10Q11]  41.4,75.95 0 top
U$203  [U#BLOX11]  41.27,77.98 0 top
U$204  [SAM#M10Q12]  27.18,59.94 0 bottom
U$205  [U#BLOX12]  27.18,62.23 0 bottom
U$206  [SFE_LOGO_FLAME_STOP_.1]  55.12,50.55 0 top
U$207  [BLK4]  59.94,87.38 90 top
U$208  [BLK4]  59.94,87.38 90 bottom
U$209  [GRN5]  76.71,87.38 90 top
U$210  [GRN5]  76.71,87.38 90 bottom
U$211  [UART7]  80.39,87.38 0 top
U$212  [UART7]  80.26,87.38 0 bottom
U$213  [PPS9]  51.05,53.85 0 top
U$214  [PWR10]  51.05,63.5 0 top
U$215  [#TX#12]  72.14,84.33 90 top
U$216  [#TX#12]  72.14,84.33 90 bottom
U$217  [#RX#13]  69.6,84.33 90 top
U$218  [#RX#13]  69.6,84.33 90 bottom
U$219  [#3V3#0]  67.06,83.82 90 top
U$220  [#3V3#0]  67.06,83.82 90 bottom
U$221  [#GND#4]  61.98,83.82 90 top
U$222  [#GND#4]  61.98,83.82 90 bottom
U$223  [#GND#5]  69.6,52.32 90 top
U$224  [#GND#5]  69.6,52.32 90 bottom
U$225  [#3V3#0]  72.14,52.32 90 top
U$226  [#3V3#0]  72.14,52.32 90 bottom
U$227  [#SCL#6]  77.22,52.07 90 top
U$228  [#SCL#6]  77.22,52.07 90 bottom
U$229  [#SDA#7]  74.68,52.2 90 top
U$230  [#SDA#7]  74.68,52.2 90 bottom
U$231  [#INT#8]  67.06,52.07 90 top
U$232  [#INT#8]  67.06,52.07 90 bottom
U$233  [#PPS#13]  59.44,52.07 90 top
U$234  [#PPS#13]  59.44,52.07 90 bottom
U$235  [##RST##15]  61.98,52.07 90 top
U$236  [##RST##15]  61.98,52.07 90 bottom
U$237  [##SAFE##16]  64.52,52.7 90 top
U$238  [##SAFE##16]  64.52,52.7 90 bottom
U$239  [SFE_LOGO_NAME_.1]  68.33,79.5 0 top
U$240  [#PWRLED#0]  54.86,60.96 0 bottom
U$241  [#PPSLED#0]  54.74,56.39 0 bottom
U$242  [#I2CPUR#0]  83.44,59.18 90 bottom
U$243  [SAM#M10Q11]  82.55,75.95 0 top
U$244  [U#BLOX11]  82.42,77.98 0 top
U$245  [SAM#M10Q12]  68.33,59.94 0 bottom
U$246  [U#BLOX12]  68.33,62.23 0 bottom
U$247  [SFE_LOGO_FLAME_STOP_.1]  96.27,50.55 0 top
U$248  [BLK4]  101.09,87.38 90 top
U$249  [BLK4]  101.09,87.38 90 bottom
U$250  [GRN5]  117.86,87.38 90 top
U$251  [GRN5]  117.86,87.38 90 bottom
U$252  [UART7]  121.54,87.38 0 top
U$253  [UART7]  121.41,87.38 0 bottom
U$254  [PPS9]  92.2,53.85 0 top
U$255  [PWR10]  92.2,63.5 0 top
U$256  [#TX#12]  113.28,84.33 90 top
U$257  [#TX#12]  113.28,84.33 90 bottom
U$258  [#RX#13]  110.74,84.33 90 top
U$259  [#RX#13]  110.74,84.33 90 bottom
U$260  [#3V3#0]  108.2,83.82 90 top
U$261  [#3V3#0]  108.2,83.82 90 bottom
U$262  [#GND#4]  103.12,83.82 90 top
U$263  [#GND#4]  103.12,83.82 90 bottom
U$264  [#GND#5]  110.74,52.32 90 top
U$265  [#GND#5]  110.74,52.32 90 bottom
U$266  [#3V3#0]  113.28,52.32 90 top
U$267  [#3V3#0]  113.28,52.32 90 bottom
U$268  [#SCL#6]  118.36,52.07 90 top
U$269  [#SCL#6]  118.36,52.07 90 bottom
U$270  [#SDA#7]  115.82,52.2 90 top
U$271  [#SDA#7]  115.82,52.2 90 bottom
U$272  [#INT#8]  108.2,52.07 90 top
U$273  [#INT#8]  108.2,52.07 90 bottom
U$274  [#PPS#13]  100.58,52.07 90 top
U$275  [#PPS#13]  100.58,52.07 90 bottom
U$276  [##RST##15]  103.12,52.07 90 top
U$277  [##RST##15]  103.12,52.07 90 bottom
U$278  [##SAFE##16]  105.66,52.7 90 top
U$279  [##SAFE##16]  105.66,52.7 90 bottom
U$280  [SFE_LOGO_NAME_.1]  109.47,79.5 0 top
U$281  [#PWRLED#0]  96.01,60.96 0 bottom
U$282  [#PPSLED#0]  95.89,56.39 0 bottom
U$283  [#I2CPUR#0]  124.59,59.18 90 bottom
U$284  [SAM#M10Q11]  123.7,75.95 0 top
U$285  [U#BLOX11]  123.57,77.98 0 top
U$286  [SAM#M10Q12]  109.47,59.94 0 bottom
U$287  [U#BLOX12]  109.47,62.23 0 bottom
U$288  [SFE_LOGO_FLAME_STOP_.1]  137.41,50.55 0 top
U$289  [BLK4]  142.24,87.38 90 top
U$290  [BLK4]  142.24,87.38 90 bottom
U$291  [GRN5]  159,87.38 90 top
U$292  [GRN5]  159,87.38 90 bottom
U$293  [UART7]  162.69,87.38 0 top
U$294  [UART7]  162.56,87.38 0 bottom
U$295  [PPS9]  133.35,53.85 0 top
U$296  [PWR10]  133.35,63.5 0 top
U$297  [#TX#12]  154.43,84.33 90 top
U$298  [#TX#12]  154.43,84.33 90 bottom
U$299  [#RX#13]  151.89,84.33 90 top
U$300  [#RX#13]  151.89,84.33 90 bottom
U$301  [#3V3#0]  149.35,83.82 90 top
U$302  [#3V3#0]  149.35,83.82 90 bottom
U$303  [#GND#4]  144.27,83.82 90 top
U$304  [#GND#4]  144.27,83.82 90 bottom
U$305  [#GND#5]  151.89,52.32 90 top
U$306  [#GND#5]  151.89,52.32 90 bottom
U$307  [#3V3#0]  154.43,52.32 90 top
U$308  [#3V3#0]  154.43,52.32 90 bottom
U$309  [#SCL#6]  159.51,52.07 90 top
U$310  [#SCL#6]  159.51,52.07 90 bottom
U$311  [#SDA#7]  156.97,52.2 90 top
U$312  [#SDA#7]  156.97,52.2 90 bottom
U$313  [#INT#8]  149.35,52.07 90 top
U$314  [#INT#8]  149.35,52.07 90 bottom
U$315  [#PPS#13]  141.73,52.07 90 top
U$316  [#PPS#13]  141.73,52.07 90 bottom
U$317  [##RST##15]  144.27,52.07 90 top
U$318  [##RST##15]  144.27,52.07 90 bottom
U$319  [##SAFE##16]  146.81,52.7 90 top
U$320  [##SAFE##16]  146.81,52.7 90 bottom
U$321  [SFE_LOGO_NAME_.1]  150.62,79.5 0 top
U$322  [#PWRLED#0]  137.16,60.96 0 bottom
U$323  [#PPSLED#0]  137.03,56.39 0 bottom
U$324  [#I2CPUR#0]  165.74,59.18 90 bottom
U$325  [SAM#M10Q11]  164.85,75.95 0 top
U$326  [U#BLOX11]  164.72,77.98 0 top
U$327  [SAM#M10Q12]  150.62,59.94 0 bottom
U$328  [U#BLOX12]  150.62,62.23 0 bottom
U$329  [SFE_LOGO_FLAME_STOP_.1]  13.97,91.69 0 top
U$330  [BLK4]  18.8,128.52 90 top
U$331  [BLK4]  18.8,128.52 90 bottom
U$332  [GRN5]  35.56,128.52 90 top
U$333  [GRN5]  35.56,128.52 90 bottom
U$334  [UART7]  39.24,128.52 0 top
U$335  [UART7]  39.12,128.52 0 bottom
U$336  [PPS9]  9.91,95 0 top
U$337  [PWR10]  9.91,104.65 0 top
U$338  [#TX#12]  30.99,125.48 90 top
U$339  [#TX#12]  30.99,125.48 90 bottom
U$340  [#RX#13]  28.45,125.48 90 top
U$341  [#RX#13]  28.45,125.48 90 bottom
U$342  [#3V3#0]  25.91,124.97 90 top
U$343  [#3V3#0]  25.91,124.97 90 bottom
U$344  [#GND#4]  20.83,124.97 90 top
U$345  [#GND#4]  20.83,124.97 90 bottom
U$346  [#GND#5]  28.45,93.47 90 top
U$347  [#GND#5]  28.45,93.47 90 bottom
U$348  [#3V3#0]  30.99,93.47 90 top
U$349  [#3V3#0]  30.99,93.47 90 bottom
U$350  [#SCL#6]  36.07,93.22 90 top
U$351  [#SCL#6]  36.07,93.22 90 bottom
U$352  [#SDA#7]  33.53,93.34 90 top
U$353  [#SDA#7]  33.53,93.34 90 bottom
U$354  [#INT#8]  25.91,93.22 90 top
U$355  [#INT#8]  25.91,93.22 90 bottom
U$356  [#PPS#13]  18.29,93.22 90 top
U$357  [#PPS#13]  18.29,93.22 90 bottom
U$358  [##RST##15]  20.83,93.22 90 top
U$359  [##RST##15]  20.83,93.22 90 bottom
U$360  [##SAFE##16]  23.37,93.85 90 top
U$361  [##SAFE##16]  23.37,93.85 90 bottom
U$362  [SFE_LOGO_NAME_.1]  27.18,120.65 0 top
U$363  [#PWRLED#0]  13.72,102.11 0 bottom
U$364  [#PPSLED#0]  13.59,97.54 0 bottom
U$365  [#I2CPUR#0]  42.29,100.33 90 bottom
U$366  [SAM#M10Q11]  41.4,117.09 0 top
U$367  [U#BLOX11]  41.27,119.13 0 top
U$368  [SAM#M10Q12]  27.18,101.09 0 bottom
U$369  [U#BLOX12]  27.18,103.38 0 bottom
U$370  [SFE_LOGO_FLAME_STOP_.1]  55.12,91.69 0 top
U$371  [BLK4]  59.94,128.52 90 top
U$372  [BLK4]  59.94,128.52 90 bottom
U$373  [GRN5]  76.71,128.52 90 top
U$374  [GRN5]  76.71,128.52 90 bottom
U$375  [UART7]  80.39,128.52 0 top
U$376  [UART7]  80.26,128.52 0 bottom
U$377  [PPS9]  51.05,95 0 top
U$378  [PWR10]  51.05,104.65 0 top
U$379  [#TX#12]  72.14,125.48 90 top
U$380  [#TX#12]  72.14,125.48 90 bottom
U$381  [#RX#13]  69.6,125.48 90 top
U$382  [#RX#13]  69.6,125.48 90 bottom
U$383  [#3V3#0]  67.06,124.97 90 top
U$384  [#3V3#0]  67.06,124.97 90 bottom
U$385  [#GND#4]  61.98,124.97 90 top
U$386  [#GND#4]  61.98,124.97 90 bottom
U$387  [#GND#5]  69.6,93.47 90 top
U$388  [#GND#5]  69.6,93.47 90 bottom
U$389  [#3V3#0]  72.14,93.47 90 top
U$390  [#3V3#0]  72.14,93.47 90 bottom
U$391  [#SCL#6]  77.22,93.22 90 top
U$392  [#SCL#6]  77.22,93.22 90 bottom
U$393  [#SDA#7]  74.68,93.34 90 top
U$394  [#SDA#7]  74.68,93.34 90 bottom
U$395  [#INT#8]  67.06,93.22 90 top
U$396  [#INT#8]  67.06,93.22 90 bottom
U$397  [#PPS#13]  59.44,93.22 90 top
U$398  [#PPS#13]  59.44,93.22 90 bottom
U$399  [##RST##15]  61.98,93.22 90 top
U$400  [##RST##15]  61.98,93.22 90 bottom
U$401  [##SAFE##16]  64.52,93.85 90 top
U$402  [##SAFE##16]  64.52,93.85 90 bottom
U$403  [SFE_LOGO_NAME_.1]  68.33,120.65 0 top
U$404  [#PWRLED#0]  54.86,102.11 0 bottom
U$405  [#PPSLED#0]  54.74,97.54 0 bottom
U$406  [#I2CPUR#0]  83.44,100.33 90 bottom
U$407  [SAM#M10Q11]  82.55,117.09 0 top
U$408  [U#BLOX11]  82.42,119.13 0 top
U$409  [SAM#M10Q12]  68.33,101.09 0 bottom
U$410  [U#BLOX12]  68.33,103.38 0 bottom
U$411  [SFE_LOGO_FLAME_STOP_.1]  96.27,91.69 0 top
U$412  [BLK4]  101.09,128.52 90 top
U$413  [BLK4]  101.09,128.52 90 bottom
U$414  [GRN5]  117.86,128.52 90 top
U$415  [GRN5]  117.86,128.52 90 bottom
U$416  [UART7]  121.54,128.52 0 top
U$417  [UART7]  121.41,128.52 0 bottom
U$418  [PPS9]  92.2,95 0 top
U$419  [PWR10]  92.2,104.65 0 top
U$420  [#TX#12]  113.28,125.48 90 top
U$421  [#TX#12]  113.28,125.48 90 bottom
U$422  [#RX#13]  110.74,125.48 90 top
U$423  [#RX#13]  110.74,125.48 90 bottom
U$424  [#3V3#0]  108.2,124.97 90 top
U$425  [#3V3#0]  108.2,124.97 90 bottom
U$426  [#GND#4]  103.12,124.97 90 top
U$427  [#GND#4]  103.12,124.97 90 bottom
U$428  [#GND#5]  110.74,93.47 90 top
U$429  [#GND#5]  110.74,93.47 90 bottom
U$430  [#3V3#0]  113.28,93.47 90 top
U$431  [#3V3#0]  113.28,93.47 90 bottom
U$432  [#SCL#6]  118.36,93.22 90 top
U$433  [#SCL#6]  118.36,93.22 90 bottom
U$434  [#SDA#7]  115.82,93.34 90 top
U$435  [#SDA#7]  115.82,93.34 90 bottom
U$436  [#INT#8]  108.2,93.22 90 top
U$437  [#INT#8]  108.2,93.22 90 bottom
U$438  [#PPS#13]  100.58,93.22 90 top
U$439  [#PPS#13]  100.58,93.22 90 bottom
U$440  [##RST##15]  103.12,93.22 90 top
U$441  [##RST##15]  103.12,93.22 90 bottom
U$442  [##SAFE##16]  105.66,93.85 90 top
U$443  [##SAFE##16]  105.66,93.85 90 bottom
U$444  [SFE_LOGO_NAME_.1]  109.47,120.65 0 top
U$445  [#PWRLED#0]  96.01,102.11 0 bottom
U$446  [#PPSLED#0]  95.89,97.54 0 bottom
U$447  [#I2CPUR#0]  124.59,100.33 90 bottom
U$448  [SAM#M10Q11]  123.7,117.09 0 top
U$449  [U#BLOX11]  123.57,119.13 0 top
U$450  [SAM#M10Q12]  109.47,101.09 0 bottom
U$451  [U#BLOX12]  109.47,103.38 0 bottom
U$452  [SFE_LOGO_FLAME_STOP_.1]  137.41,91.69 0 top
U$453  [BLK4]  142.24,128.52 90 top
U$454  [BLK4]  142.24,128.52 90 bottom
U$455  [GRN5]  159,128.52 90 top
U$456  [GRN5]  159,128.52 90 bottom
U$457  [UART7]  162.69,128.52 0 top
U$458  [UART7]  162.56,128.52 0 bottom
U$459  [PPS9]  133.35,95 0 top
U$460  [PWR10]  133.35,104.65 0 top
U$461  [#TX#12]  154.43,125.48 90 top
U$462  [#TX#12]  154.43,125.48 90 bottom
U$463  [#RX#13]  151.89,125.48 90 top
U$464  [#RX#13]  151.89,125.48 90 bottom
U$465  [#3V3#0]  149.35,124.97 90 top
U$466  [#3V3#0]  149.35,124.97 90 bottom
U$467  [#GND#4]  144.27,124.97 90 top
U$468  [#GND#4]  144.27,124.97 90 bottom
U$469  [#GND#5]  151.89,93.47 90 top
U$470  [#GND#5]  151.89,93.47 90 bottom
U$471  [#3V3#0]  154.43,93.47 90 top
U$472  [#3V3#0]  154.43,93.47 90 bottom
U$473  [#SCL#6]  159.51,93.22 90 top
U$474  [#SCL#6]  159.51,93.22 90 bottom
U$475  [#SDA#7]  156.97,93.34 90 top
U$476  [#SDA#7]  156.97,93.34 90 bottom
U$477  [#INT#8]  149.35,93.22 90 top
U$478  [#INT#8]  149.35,93.22 90 bottom
U$479  [#PPS#13]  141.73,93.22 90 top
U$480  [#PPS#13]  141.73,93.22 90 bottom
U$481  [##RST##15]  144.27,93.22 90 top
U$482  [##RST##15]  144.27,93.22 90 bottom
U$483  [##SAFE##16]  146.81,93.85 90 top
U$484  [##SAFE##16]  146.81,93.85 90 bottom
U$485  [SFE_LOGO_NAME_.1]  150.62,120.65 0 top
U$486  [#PWRLED#0]  137.16,102.11 0 bottom
U$487  [#PPSLED#0]  137.03,97.54 0 bottom
U$488  [#I2CPUR#0]  165.74,100.33 90 bottom
U$489  [SAM#M10Q11]  164.85,117.09 0 top
U$490  [U#BLOX11]  164.72,119.13 0 top
U$491  [SAM#M10Q12]  150.62,101.09 0 bottom
U$492  [U#BLOX12]  150.62,103.38 0 bottom

## Library data of the parts
BT1-BT12 = SparkFun-Batteries; PROD_ID: BAT-16685
C1-C24 = SparkFun-Capacitors; PROD_ID: CAP-00810
D1 D5 D8 D11 D14 D17 D20 D23 D26 D29 D32 D35 = SparkFun-LED; PROD_ID: DIO-09003
D2 D4 D7 D10 D13 D16 D19 D22 D25 D28 D31 D34 = SparkFun-DiscreteSemi; PROD_ID: DIO-10955
D3 D6 D9 D12 D15 D18 D21 D24 D27 D30 D33 D36 = SparkFun-LED; PROD_ID: DIO-00819
E$1-E$4 FD1-FD48 LOGO1-LOGO36 U$1 U$31 U$39 U$75 U$83 U$116 U$124 U$157 U$165 U$198 U$206 U$239 U$247 U$280 U$288 U$321 U$329 U$362 U$370 U$403 U$411 U$444 U$452 U$485 = SparkFun-Aesthetics
E$5 E$6 = SparkFun-Retired
H1-H48 = SparkFun-Hardware
I2CPUR I2CPUR1-I2CPUR11 PPSLED PPSLED1-PPSLED11 PWRLED PWRLED1-PWRLED11 = SparkFun-Jumpers
J1 J2 J5 J6 J9 J10 J13 J14 J17 J18 J21 J22 J25 J26 J29 J30 J33 J34 J37 J38 J41 J42 J45 J46 = SparkFun-Connectors; PROD_ID: CONN-13694
J3 J8 J12 J16 J20 J24 J28 J32 J36 J40 J44 J48 = SparkFun-Connectors; PROD_ID: CONN-08438
J4 J7 J11 J15 J19 J23 J27 J31 J35 J39 J43 J47 = SparkFun-Connectors
R1 R8 R9 R13 R14 R18 R22 R23 R27 R31 R32 R36 R40 R41 R45 R49 R50 R54 R58 R59 R63 R67 R68 R72 R76 R77 R81 R85 R86 R90 R94 R95 R99 R103 R104 R108 = SparkFun-Resistors; PROD_ID: RES-08272
R2 R10 R19 R28 R37 R46 R55 R64 R73 R82 R91 R100 = SparkFun-Resistors; PROD_ID: RES-07851
R3 R17 R26 R35 R44 R53 R62 R71 R80 R89 R98 R107 = SparkFun-Resistors; PROD_ID: RES-07856
R4 R5 R15 R16 R24 R25 R33 R34 R42 R43 R51 R52 R60 R61 R69 R70 R78 R79 R87 R88 R96 R97 R105 R106 = SparkFun-Resistors; PROD_ID: RES-08698
R6 R7 R11 R12 R20 R21 R29 R30 R38 R39 R47 R48 R56 R57 R65 R66 R74 R75 R83 R84 R92 R93 R101 R102 = SparkFun-Resistors; PROD_ID: RES-07869
U1-U12 = u-blox_SAM-M10Q; PROD_ID: IC-17910
U$2-U$30 U$32-U$38 U$40-U$74 U$76-U$82 U$84-U$115 U$117-U$123 U$125-U$156 U$158-U$164 U$166-U$197 U$199-U$205 U$207-U$238 U$240-U$246 U$248-U$279 U$281-U$287 U$289-U$320 U$322-U$328 U$330-U$361 U$363-U$369 U$371-U$402 U$404-U$410 U$412-U$443 U$445-U$451 U$453-U$484 U$486-U$492 = output